# EAGLE board Lenovo_Scanner (EAGLE 8.2.2)
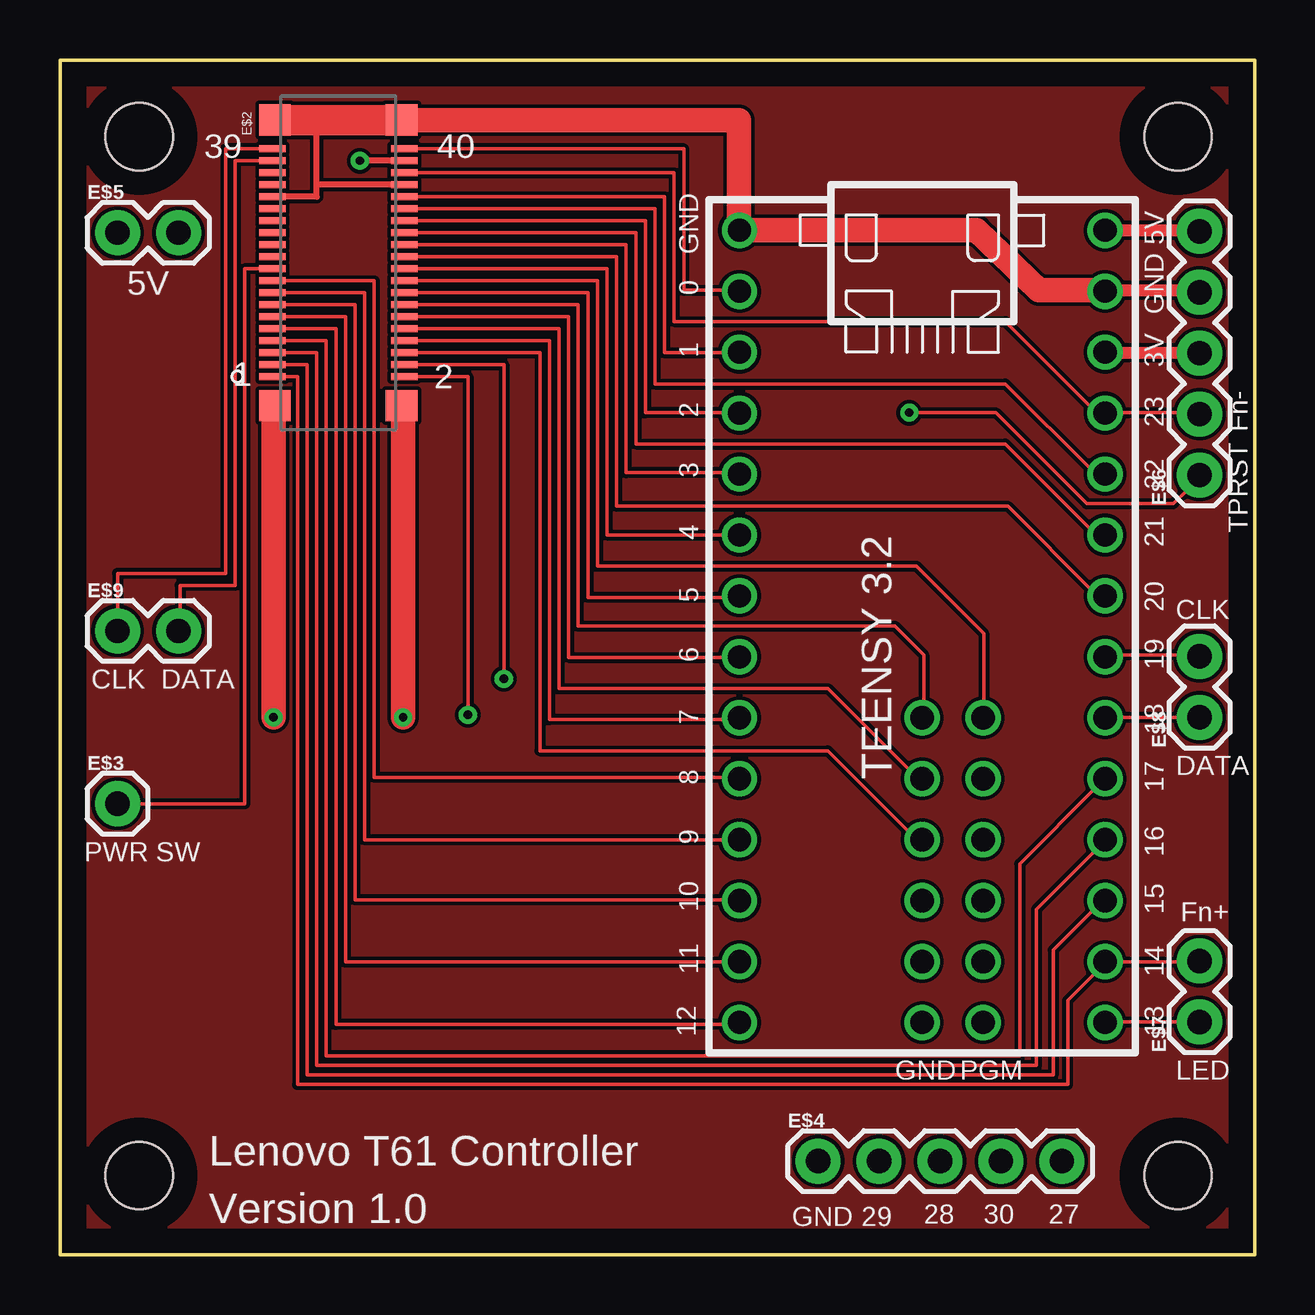
[diagram p0: board, top side]
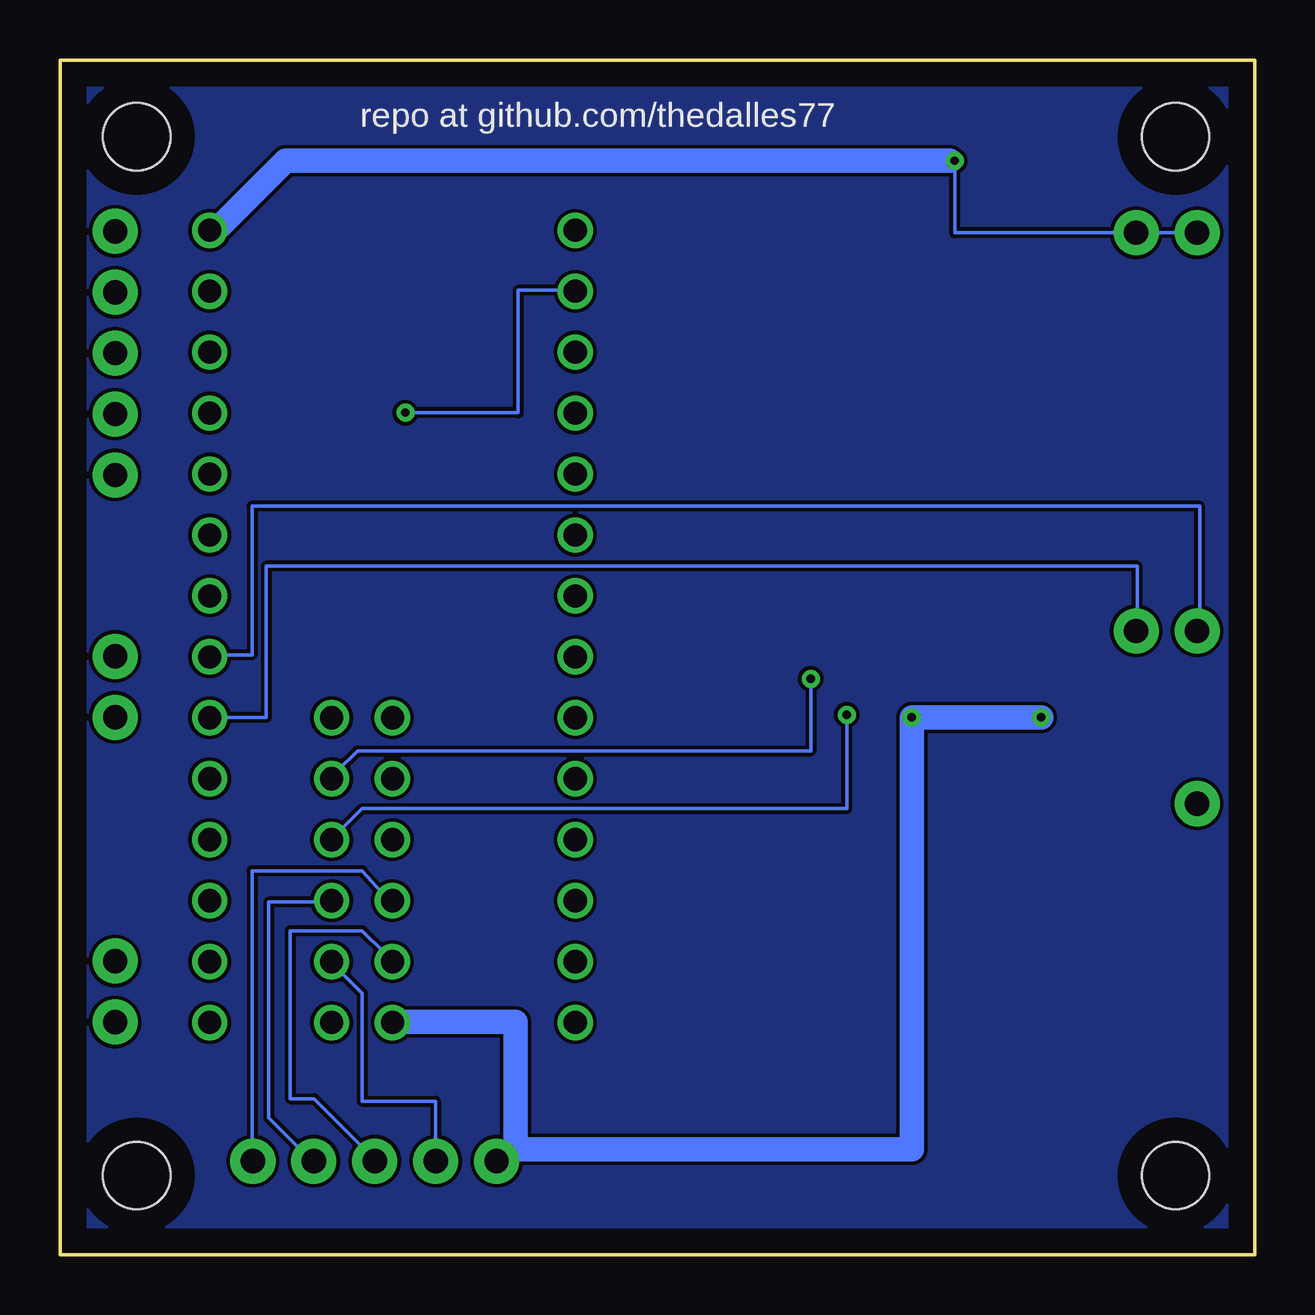
[diagram p1: board, bottom side, seen from below]

Size 49.8 x 49.8 mm. Coordinates in mm from the lower left corner, seen from the top.
Outline: 0,0 0,49.8 49.8,49.8 49.8,0 0,0
Copper layers (1*16): Top 0.035mm / dielectric 1.5mm / Bottom 0.035mm
Design rules "default": minimum track width 6mil, minimum drill 0.35mm, track to track 6mil, track to pad 6mil, pad to pad 6mil, via to via 6mil, smd to smd 6mil, copper to edge 40mil, drill to drill 6mil, minimum pad ring 10mil, minimum via ring 8mil, stop-mask expansion 4mil, vias tented up to drill 0mil, thermal gap 10mil
Holes 2.8 mm at 46.6,46.6 3.3,46.6 3.3,3.3 46.6,3.3

## Footprints (pad centres in the part's own frame; a part is rotated, then mirrored left to right if it is on the bottom)
TEENSY_3P2MIN = drill 0.965: 0 -10.16,-5.08; 1 -7.62,-5.08; 2 -5.08,-5.08; 3 -2.54,-5.08; 3V1 -7.62,10.16; 4 0,-5.08; 5 2.54,-5.08; 6 5.08,-5.08; 7 7.62,-5.08; 8 10.16,-5.08; 9 12.7,-5.08; 10 15.24,-5.08; 11 17.78,-5.08; 12 20.32,-5.08; 13 20.32,10.16; 14 17.78,10.16; 15 15.24,10.16; 16 12.7,10.16; 17 10.16,10.16; 18 7.62,10.16; 19 5.08,10.16; 20 2.54,10.16; 21 0,10.16; 22 -2.54,10.16; 23 -5.08,10.16; 24 7.62,2.54; 25 10.16,2.54; 26 12.7,2.54; 27 15.24,2.54; 28 17.78,2.54; 29 17.78,5.08; 30 15.24,5.08; 31 12.7,5.08; 32 10.16,5.08; 33 7.62,5.08; AGND -10.16,10.16; GND1 -12.7,-5.08; GND2 20.32,2.54; PGM 20.32,5.08; VIN -12.7,10.16
WM6787CT-ND = smd 0.3 x 1.1: P$1 -4.7,2.85; P$2 -4.7,-2.65; P$3 -4.2,2.85; P$4 -4.2,-2.65; P$5 -3.7,2.85; P$6 -3.7,-2.65; P$7 -3.2,2.85; P$8 -3.2,-2.65; P$9 -2.7,2.85; P$10 -2.7,-2.65; P$11 -2.2,2.85; P$12 -2.2,-2.65; P$13 -1.7,2.85; P$14 -1.7,-2.65; P$15 -1.2,2.85; P$16 -1.2,-2.65; P$17 -0.7,2.85; P$18 -0.7,-2.65; P$19 -0.2,2.85; P$20 -0.2,-2.65; P$21 0.3,2.85; P$22 0.3,-2.65; P$23 0.8,2.85; P$24 0.8,-2.65; P$25 1.3,2.85; P$26 1.3,-2.65; P$27 1.8,2.85; P$28 1.8,-2.65; P$29 2.3,2.85; P$30 2.3,-2.65; P$31 2.8,2.85; P$32 2.8,-2.65; P$33 3.3,2.85; P$34 3.3,-2.65; P$35 3.8,2.85; P$36 3.8,-2.65; P$37 4.3,2.85; P$38 4.3,-2.65; P$39 4.8,2.85; P$40 4.8,-2.65 | smd 1.3 x 1.32: P$41 -5.9,2.74; P$42 -5.9,-2.54; P$43 6,2.74; P$44 6,-2.54
1X01 = drill 1.016 pad 1.88: 1 0,0
1X05 = drill 1.016 pad 1.88: 1 0,0; 2 2.54,0; 3 5.08,0; 4 7.62,0; 5 10.16,0
1X02 = drill 1.016 pad 1.88: 1 0,0; 2 2.54,0

## Placement (x,y rotation side)
E$1  [TEENSY_3P2MIN]  33.4,30 270 top
E$2  [WM6787CT-ND]  11.7,41.3 90 top  (not fitted)
E$3  [1X01]  2.4,18.8 0 top  (not fitted)
E$4  [1X05]  31.6,3.9 0 top  (not fitted)
E$5  [1X02]  2.4,42.6 0 top  (not fitted)
E$6  [1X05]  47.5,32.5 90 top  (not fitted)
E$7  [1X02]  47.5,9.7 90 top  (not fitted)
E$8  [1X02]  47.5,22.4 90 top  (not fitted)
E$9  [1X02]  2.4,26 0 top  (not fitted)

## Library data of the parts
E$1 = Teensy_3p2_min
E$2 = WM6787CT-ND
E$3-E$9 = SparkFun-Connectors

## Tracks (layer width: path | path; a pad name or v marks a point on that pad's centre or on a via)
S$1
  pour Top: 0,49.8 49.8,49.8 49.8,0 0,0
S$2
  Top 0.254: 14,45.6 12.8,45.6
S$3  (via drill 0.35)
  other vias: 12.5,45.6
S$4
  Top 0.152: 43,35.3 39.4,38.9 25.6,38.9 25.6,45.1 14.8,45.1
S$5
  Top 0.152: 43,32.7 39.4,36.3 24.8,36.3 24.8,43.6 14.8,43.6
S$6
  Top 0.152: 14.8,44.1 25.2,44.1 25.2,37.6 26.1,37.6 26.2,37.6 27.8,37.6
S$7
  Top 0.152: 43.1,30.1 39.4,33.8 24,33.8 24,42.6 14.8,42.6
S$8
  Top 0.152: 27.8,32.6 23.6,32.6 23.6,42.1 14.9,42.1
S$9
  Top 0.152: 43.1,27.6 39.5,31.2 23.2,31.2 23.2,41.6 14.8,41.6
S$10
  Top 1.016: 43,40.2 40.8,40.2 38.2,42.7 28.3,42.7 | 28.3,42.7 28.1,42.7 | 14.7,47.3 28.3,47.3 28.3,42.7
S$11
  Bottom 1.016: 43.1,42.9 40.4,45.6
S$12
  Top 0.254: 13.9,44.6 10.7,44.6
S$13
  Top 1.27: 9.2,47.3 14.1,47.3
S$14
  Top 0.254: 9.3,44.1 10.7,44.1 10.7,47
S$15  (via drill 0.35)
  Bottom 0.152: 28.8,40.2 30.7,40.2 30.7,35.1 v35.4,35.1
S$16
  Top 0.152: 14.9,37.1 18.5,37.1 18.5,24.3
S$17
  Top 0.152: 14.9,36.6 17,36.6 17,22.7
S$18
  Top 0.152: 8.4,45.6 7.3,45.6 7.3,27.9 5,27.9 5,26.5
S$19
  Top 0.152: 8.4,46.1 6.9,46.1 6.9,28.4 2.4,28.4 2.4,26.5
S$20
  Bottom 0.152: 4.9,26.6 4.9,28.7 41.2,28.7 41.2,22.4 43,22.4
S$21
  Bottom 0.152: 2.3,26.6 2.3,31.2 41.8,31.2 41.8,25 43,25
S$22
  Bottom 0.152: 3.1,42.6 4.3,42.6
S$23
  Bottom 0.152: 5.7,42.6 12.5,42.6 12.5,45.5
S$24
  Top 0.152: 8.4,41.1 7.7,41.1 7.7,18.8 3,18.8
S$25
  Top 0.152: 9.3,36.6 9.9,36.6 9.9,7.1 42,7.1 42,10.6 43.2,11.8
S$26
  Top 0.152: 9.4,37.1 10.3,37.1 10.3,7.5 41.4,7.5 41.4,12.7 43.1,14.4
S$27
  Top 0.152: 9.4,37.6 10.7,37.6 10.7,7.9 40.7,7.9 40.7,14.4 43.3,17
S$28
  Top 0.152: 43.2,19.5 40,16.3 40,8.3 11.1,8.3 11.1,38.1 9.3,38.1
S$29
  Top 0.152: 27.8,30 22.8,30 22.8,41.1 14.8,41.1
S$30
  Top 0.152: 38.5,22.8 38.5,25.9 35.7,28.7 22.4,28.7 22.4,40.6 14.8,40.6
S$31
  Top 0.152: 9.4,39.6 12.3,39.6 12.3,14.8 27.8,14.8
S$32
  Top 0.152: 9.4,40.1 12.7,40.1 12.7,17.3 27.8,17.3
S$33
  Top 0.152: 9.3,40.6 13.1,40.6 13.1,19.9 27.8,19.9
S$34
  Top 0.152: 11.9,12.2 11.9,39.1 9.4,39.1
S$35
  Top 0.152: 9.4,38.6 11.5,38.6 11.5,9.6 27.8,9.6
S$36
  Top 0.152: 27.8,27.4 22,27.4 22,40.1 14.8,40.1
S$37
  Top 0.152: 11.9,12.2 27.8,12.2
S$38
  Top 0.152: 36,22.9 36,25 34.8,26.2 21.6,26.2 21.6,39.6 14.8,39.6
S$39
  Top 0.152: 27.8,24.9 21.2,24.9 21.2,39.1 14.9,39.1
S$40
  Top 0.152: 35.5,20.1 32,23.6 20.8,23.6 20.8,38.6 14.8,38.6
S$41
  Top 0.152: 27.8,22.3 20.4,22.3 20.4,38.1 14.8,38.1
S$42
  Top 0.152: 35.4,17.6 32,21 20,21 20,37.6 14.8,37.6
S$43  (via drill 0.35)
  other vias: 18.5,24
S$44  (via drill 0.35)
  other vias: 17,22.5
S$45
  Bottom 1.016: 12.7,45.6 40.2,45.6
S$46
  Top 0.152: 27.8,40.2 26,40.2 26,46.1 14.8,46.1
S$47
  Bottom 0.152: 38.2,20.2 37.4,21 18.5,21 18.5,23.7
S$48
  Bottom 0.152: 38.1,17.7 37.2,18.6 17,18.6 17,22.2
S$49  (via drill 0.35)
  Top 1.016: v8.9,22.4 8.9,35.3 | v14.3,22.4 14.3,35.1
  Bottom 1.016: 36.1,9.7 30.8,9.7 30.8,4.4 14.3,4.4 v14.3,22.4 v8.9,22.4
S$50
  Top 0.152: 35.7,35.1 39,35.1 42.8,31.3 46.4,31.3 47,31.9
S$53
  Bottom 0.152: 36.4,15.1 37.2,16 41.8,16 41.8,4.5
S$54
  Bottom 0.152: 39.1,14.7 41.1,14.7 41.1,5.7 39.8,4.4
S$55
  Bottom 0.152: 36.3,12.6 37.2,13.5 40.2,13.5 40.2,6.5 39.2,6.5 37.2,4.5
S$56
  Bottom 0.152: 38.1,11.8 37.2,10.9 37.2,6.4 34.15,6.4 34.15,4.4
S$57
  Top 0.152: 44.2,35.1 46.6,35.1
S$58
  Top 0.152: 44.1,12.2 46.9,12.2
S$59
  Top 0.152: 46.9,22.4 44.1,22.4
S$60
  Top 0.152: 46.9,25 44.1,25
S$61
  Top 0.152: 44.1,9.7 46.9,9.7
S$62
  Top 0.508: 44.2,37.6 46.8,37.6
S$63
  Top 0.508: 44.2,40.2 46.8,40.2
S$64
  Top 0.508: 44.2,42.7 46.8,42.7
S$69
  pour Bottom: 0,0 0,49.8 49.8,49.8 49.8,0
S$70
  Top 0.152: 27.8,35.1 24.4,35.1 24.4,43.1 14.8,43.1

## Text on the board
tPlace: 39 | 40 | GND | 5V | 5V | 0 | GND | 1 | 3V | 1 | 2 | 2 | 23 | Fn- | 3 | 22 | 4 | 21 | TPRST | 5 | 20 | CLK | 6 | CLK | DATA | 19 | 7 | 18 | 8 | DATA | 17 | 9 | 16 | PWR SW | 10 | 15 | Fn+ | 11 | 14 | 12 | 13 | GND | PGM | LED | Lenovo T61 Controller | Version 1.0 | GND | 29 | 28 | 30 | 27
bPlace: repo at github.com/thedalles77